# EAGLE board LEDSubMatrixHighDensity_template (EAGLE 9.6.2)
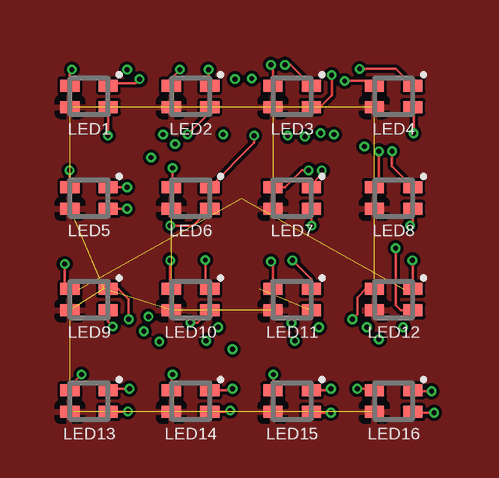
[diagram p0: board, top side]
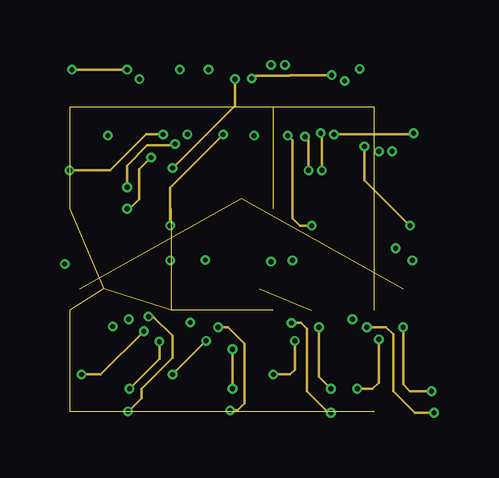
[diagram p1: board, inner layer InnerBottom]
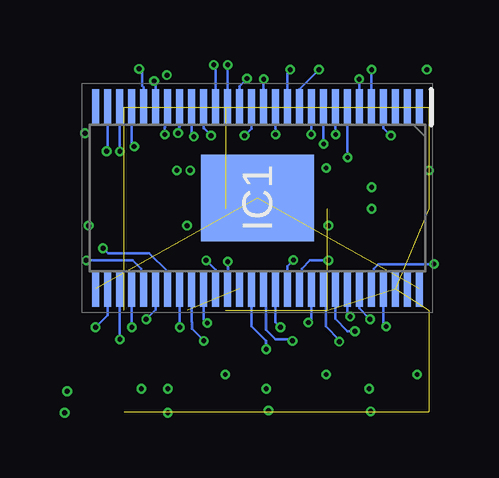
[diagram p2: board, bottom side, seen from below]

No outline drawn. Coordinates in mm, seen from the top.
Copper layers (1+2*15+16): Top 0.035mm / dielectric 0.2mm / InnerTop 0.0175mm / dielectric 1.065mm / InnerBottom 0.0175mm / dielectric 0.2mm / Bottom 0.035mm
Design rules "jlcpcb_4layer_1oz *": minimum track width 3.5mil, minimum drill 0.2mm, track to track 5mil, track to pad 0.2mm, pad to pad 5mil, via to via 6mil, smd to smd 5mil, copper to edge 40mil, drill to drill 6mil, minimum pad ring 10mil, minimum via ring 0.1mm, stop-mask expansion 4mil, vias tented up to drill 0mil, thermal gap 10mil

## Footprints (pad centres in the part's own frame; a part is rotated, then mirrored left to right if it is on the bottom)
SOP50P810X120-57N = smd 1.475 x 0.3: 1 -3.788,6.75; 2 -3.788,6.25; 3 -3.788,5.75; 4 -3.788,5.25; 5 -3.788,4.75; 6 -3.788,4.25; 7 -3.788,3.75; 8 -3.788,3.25; 9 -3.788,2.75; 10 -3.788,2.25; 11 -3.788,1.75; 12 -3.788,1.25; 13 -3.788,0.75; 14 -3.788,0.25; 15 -3.788,-0.25; 16 -3.788,-0.75; 17 -3.788,-1.25; 18 -3.788,-1.75; 19 -3.788,-2.25; 20 -3.788,-2.75; 21 -3.788,-3.25; 22 -3.788,-3.75; 23 -3.788,-4.25; 24 -3.788,-4.75; 25 -3.788,-5.25; 26 -3.788,-5.75; 27 -3.788,-6.25; 28 -3.788,-6.75; 29 3.788,-6.75; 30 3.788,-6.25; 31 3.788,-5.75; 32 3.788,-5.25; 33 3.788,-4.75; 34 3.788,-4.25; 35 3.788,-3.75; 36 3.788,-3.25; 37 3.788,-2.75; 38 3.788,-2.25; 39 3.788,-1.75; 40 3.788,-1.25; 41 3.788,-0.75; 42 3.788,-0.25; 43 3.788,0.25; 44 3.788,0.75; 45 3.788,1.25; 46 3.788,1.75; 47 3.788,2.25; 48 3.788,2.75; 49 3.788,3.25; 50 3.788,3.75; 51 3.788,4.25; 52 3.788,4.75; 53 3.788,5.25; 54 3.788,5.75; 55 3.788,6.25; 56 3.788,6.75 | smd 3.61 x 4.7: 57 0,0
B38G3RGB = smd 0.8 x 0.5: 1 0.8,0.45; 2 0.8,-0.45; 3 -0.8,-0.45; 4 -0.8,0.45

## Placement (x,y rotation side)
IC1  TLC5955DCAR  [SOP50P810X120-57N]  8.47,-6.35 270 bottom
LED1  B38G3RGB  [B38G3RGB]  2.12,-2.12 0 top
LED2  B38G3RGB  [B38G3RGB]  6.35,-2.12 0 top
LED3  B38G3RGB  [B38G3RGB]  10.58,-2.12 0 top
LED4  B38G3RGB  [B38G3RGB]  14.82,-2.12 0 top
LED5  B38G3RGB  [B38G3RGB]  2.12,-6.35 0 top
LED6  B38G3RGB  [B38G3RGB]  6.35,-6.35 0 top
LED7  B38G3RGB  [B38G3RGB]  10.58,-6.35 0 top
LED8  B38G3RGB  [B38G3RGB]  14.82,-6.35 0 top
LED9  B38G3RGB  [B38G3RGB]  2.12,-10.58 0 top
LED10  B38G3RGB  [B38G3RGB]  6.35,-10.58 0 top
LED11  B38G3RGB  [B38G3RGB]  10.58,-10.58 0 top
LED12  B38G3RGB  [B38G3RGB]  14.82,-10.58 0 top
LED13  B38G3RGB  [B38G3RGB]  2.12,-14.82 0 top
LED14  B38G3RGB  [B38G3RGB]  6.35,-14.82 0 top
LED15  B38G3RGB  [B38G3RGB]  10.58,-14.82 0 top
LED16  B38G3RGB  [B38G3RGB]  14.82,-14.82 0 top

## Library data of the parts
IC1 = TLC5955DCAR; ARROW_PART_NUMBER: TLC5955DCAR; ARROW_PRICE-STOCK: https://www.arrow.com/en/products/tlc5955dcar/texas-instruments; DESCRIPTION: 48ch, 16bit PWM LED Driver with Dot-Correction, Brightness Control, Open/Short Detection; HEIGHT: 1.2mm; MANUFACTURER_NAME: Texas Instruments; MANUFACTURER_PART_NUMBER: TLC5955DCAR; MOUSER_PART_NUMBER: 595-TLC5955DCAR; MOUSER_PRICE-STOCK: https://www.mouser.co.uk/ProductDetail/Texas-Instruments/TLC5955DCAR?qs=%2Fd%252BFzHvH4c3zo%2FeGYG5n7g%3D%3D
LED1-LED16 = B38G3RGB; ARROW_PART_NUMBER: SML-LX0606IGC-TR; ARROW_PRICE-STOCK: https://www.arrow.com/en/products/sml-lx0606igc-tr/lumex; DESCRIPTION: Standard LEDs - SMD Surface Mount LEDs; HEIGHT: 0.7mm; MANUFACTURER_NAME: Lumex; MANUFACTURER_PART_NUMBER: SML-LX0606IGC-TR; MOUSER_PART_NUMBER: 696-SML-0606IGCTR; MOUSER_PRICE-STOCK: https://www.mouser.co.uk/ProductDetail/Lumex/SML-LX0606IGC-TR?qs=I1ILoAvtKy%252BVd7WFwiUkZQ%3D%3D

## Nets
3V3: IC1.54 LED1.3 LED2.3 LED3.3 LED4.3 LED5.3 LED6.3 LED7.3 LED8.3 LED9.3 LED10.3 LED11.3 LED12.3 LED13.3 LED14.3 LED15.3 LED16.3
GND: IC1.29 IC1.56 IC1.57
GSCLK: IC1.55
LAT: IC1.3
N$LEDB1_IC1_PIN4: IC1.4 LED1.2
N$LEDB2_IC1_PIN10: IC1.10 LED2.2
N$LEDB3_IC1_PIN16: IC1.16 LED3.2
N$LEDB4_IC1_PIN22: IC1.22 LED4.2
N$LEDB5_IC1_PIN7: IC1.7 LED5.2
N$LEDB6_IC1_PIN13: IC1.13 LED6.2
N$LEDB7_IC1_PIN19: IC1.19 LED7.2
N$LEDB8_IC1_PIN25: IC1.25 LED8.2
N$LEDB9_IC1_PIN53: IC1.53 LED9.2
N$LEDB10_IC1_PIN47: IC1.47 LED10.2
N$LEDB11_IC1_PIN41: IC1.41 LED11.2
N$LEDB12_IC1_PIN35: IC1.35 LED12.2
N$LEDB13_IC1_PIN50: IC1.50 LED13.2
N$LEDB14_IC1_PIN44: IC1.44 LED14.2
N$LEDB15_IC1_PIN38: IC1.38 LED15.2
N$LEDB16_IC1_PIN32: IC1.32 LED16.2
N$LEDG1_IC1_PIN6: IC1.6 LED1.1
N$LEDG2_IC1_PIN12: IC1.12 LED2.1
N$LEDG3_IC1_PIN18: IC1.18 LED3.1
N$LEDG4_IC1_PIN24: IC1.24 LED4.1
N$LEDG5_IC1_PIN9: IC1.9 LED5.1
N$LEDG6_IC1_PIN15: IC1.15 LED6.1
N$LEDG7_IC1_PIN21: IC1.21 LED7.1
N$LEDG8_IC1_PIN27: IC1.27 LED8.1
N$LEDG9_IC1_PIN51: IC1.51 LED9.1
N$LEDG10_IC1_PIN45: IC1.45 LED10.1
N$LEDG11_IC1_PIN39: IC1.39 LED11.1
N$LEDG12_IC1_PIN33: IC1.33 LED12.1
N$LEDG13_IC1_PIN48: IC1.48 LED13.1
N$LEDG14_IC1_PIN42: IC1.42 LED14.1
N$LEDG15_IC1_PIN36: IC1.36 LED15.1
N$LEDG16_IC1_PIN30: IC1.30 LED16.1
N$LEDR1_IC1_PIN5: IC1.5 LED1.4
N$LEDR2_IC1_PIN11: IC1.11 LED2.4
N$LEDR3_IC1_PIN17: IC1.17 LED3.4
N$LEDR4_IC1_PIN23: IC1.23 LED4.4
N$LEDR5_IC1_PIN8: IC1.8 LED5.4
N$LEDR6_IC1_PIN14: IC1.14 LED6.4
N$LEDR7_IC1_PIN20: IC1.20 LED7.4
N$LEDR8_IC1_PIN26: IC1.26 LED8.4
N$LEDR9_IC1_PIN52: IC1.52 LED9.4
N$LEDR10_IC1_PIN46: IC1.46 LED10.4
N$LEDR11_IC1_PIN40: IC1.40 LED11.4
N$LEDR12_IC1_PIN34: IC1.34 LED12.4
N$LEDR13_IC1_PIN49: IC1.49 LED13.4
N$LEDR14_IC1_PIN43: IC1.43 LED14.4
N$LEDR15_IC1_PIN37: IC1.37 LED15.4
N$LEDR16_IC1_PIN31: IC1.31 LED16.4
SCLK: IC1.2
SIN_MCU: IC1.1
SOUT1: IC1.28

## Tracks (layer width: path | path; a pad name or v marks a point on that pad's centre or on a via)
3V3  (16 unrouted)
  pour Top: -20,20 40,20 40,-140
GND  (2 unrouted)
N$LEDB1_IC1_PIN4  (via drill 0.2 pad 0.4)
  Top 0.1: v2.9,-3.75 2.9,-2.58 LED1.2
  Bottom 0.1: IC1.4 3.22,-3.44 v2.9,-3.75
N$LEDB2_IC1_PIN10  (via drill 0.2)
  Top 0.1: v6.22,-3.7 7.15,-2.77 LED2.2
  Bottom 0.1: IC1.10 v6.22,-3.7
N$LEDB3_IC1_PIN16  (via drill 0.2)
  Top 0.1: v12.24,-1.23 12.24,-2.06 11.73,-2.57 LED3.2
  InnerBottom 0.1: v12.24,-1.23 10.5,-1.23 10.47,-1.25 9.02,-1.25 v8.9,-1.37
  Bottom 0.1: IC1.16 9.22,-1.69 v8.9,-1.37
N$LEDB4_IC1_PIN22  (via drill 0.2)
  Top 0.1: v15.65,-3.65 15.65,-2.6 LED4.2
  InnerBottom 0.1: v12.33,-3.7 15.61,-3.7 v15.65,-3.65
  Bottom 0.1: IC1.22 12.32,-2.66 12.32,-3.4 12.33,-3.41 v12.33,-3.7
N$LEDB5_IC1_PIN7  (via drill 0.2 pad 0.4)
  Top 0.1: v3.7,-6.8 LED5.2
  InnerBottom 0.1: v4.7,-4.66 4.2,-5.16 4.2,-6.4 3.8,-6.8 v3.7,-6.8
  Bottom 0.1: IC1.7 4.7,-2.58 v4.7,-4.66 | v4.7,-4.66
N$LEDB6_IC1_PIN13  (via drill 0.2)
  Top 0.1: v5.5,-7.5 6.45,-7.5 LED6.2
  InnerBottom 0.1: v7.71,-3.71 5.5,-5.91 v5.5,-7.5
  Bottom 0.1: IC1.13 7.72,-3.7 v7.71,-3.71
N$LEDB7_IC1_PIN19  (via drill 0.2)
  Top 0.1: v11.4,-7.5 11.38,-7.48 LED7.2
  InnerBottom 0.1: v10.4,-3.75 10.6,-3.95 10.6,-7.2 10.9,-7.5 v11.4,-7.5
  Bottom 0.1: IC1.19 10.72,-3.45 10.7,-3.45 v10.4,-3.75
N$LEDB8_IC1_PIN25  (via drill 0.2)
  Top 0.1: v15.5,-7.5 15.62,-7.38 LED8.2
  InnerBottom 0.1: v13.6,-4.21 13.6,-5.6 v15.5,-7.5
  Bottom 0.1: IC1.25 13.72,-4.09 v13.6,-4.21
N$LEDB9_IC1_PIN53  (via drill 0.2)
  Top 0.1: v3.1,-11.7 2.92,-11.52 LED9.2
  Bottom 0.1: IC1.53 3.22,-11.58 v3.1,-11.7
N$LEDB10_IC1_PIN47  (via drill 0.2)
  Top 0.1: v6.34,-11.54 6.65,-11.54 LED10.2
  Bottom 0.1: IC1.47 6.22,-11.42 v6.34,-11.54
N$LEDB11_IC1_PIN41  (1 unrouted)
N$LEDB12_IC1_PIN35  (via drill 0.2)
  Top 0.1: v14.9,-8.44 14.9,-10.82 15.11,-11.03 LED12.2
  Bottom 0.1: IC1.35 12.22,-9.4 12.97,-8.64 14.7,-8.64 v14.9,-8.44
N$LEDB13_IC1_PIN50  (via drill 0.2)
  Top 0.1: v3.74,-15.24 3.71,-15.27 LED13.2
  InnerBottom 0.1: v4.59,-11.29 4.79,-11.29 5.59,-12.09 5.59,-13.01 4.3,-14.3 4.3,-14.7 3.76,-15.24 v3.74,-15.24
  Bottom 0.1: IC1.50 4.72,-11.17 v4.59,-11.29
N$LEDB14_IC1_PIN44  (via drill 0.2)
  Top 0.1: v8,-15.2 7.93,-15.27 LED14.2
  InnerBottom 0.1: v7.5,-11.74 7.92,-11.74 8.6,-12.42 8.6,-14.9 8.3,-15.2 v8,-15.2
  Bottom 0.1: IC1.44 7.72,-11.52 v7.5,-11.74
N$LEDB15_IC1_PIN38  (via drill 0.2)
  Top 0.1: v12.2,-15.3 11.42,-15.3 LED15.2
  InnerBottom 0.1: v10.55,-11.55 10.95,-11.55 11.2,-11.8 11.2,-14.4 12.1,-15.3 v12.2,-15.3
  Bottom 0.1: IC1.38 10.72,-11.39 v10.55,-11.55
N$LEDB16_IC1_PIN32  (via drill 0.2)
  Top 0.1: v16.5,-15.3 15.65,-15.3 LED16.2
  InnerBottom 0.1: v13.7,-11.74 14.5,-11.74 14.8,-12.04 14.8,-14.4 15.7,-15.3 v16.5,-15.3
  Bottom 0.1: IC1.32 13.72,-11.72 v13.7,-11.74
N$LEDG1_IC1_PIN6  (via drill 0.2 pad 0.4)
  Top 0.1: v4.22,-1.4 4.05,-1.57 3.02,-1.57 LED1.1
  Bottom 0.1: IC1.6 v4.22,-1.4
N$LEDG2_IC1_PIN12  (via drill 0.2)
  Top 0.1: v7.1,-1 7.1,-1.62 LED2.1
  Bottom 0.1: IC1.12 7.22,-1.12 v7.1,-1
N$LEDG3_IC1_PIN18  (via drill 0.2)
  Top 0.1: v10.29,-0.8 10.52,-0.8 LED3.1
  Bottom 0.1: IC1.18 10.22,-0.87 v10.29,-0.8
N$LEDG4_IC1_PIN24  (via drill 0.2)
  Top 0.1: v13.4,-0.97 14.92,-0.97 LED4.1
  Bottom 0.1: IC1.24 13.22,-1.75 13.28,-1.68 13.28,-1.09 v13.4,-0.97
N$LEDG5_IC1_PIN9  (via drill 0.2 pad 0.4)
  Top 0.1: v3.7,-5.9 LED5.1
  InnerBottom 0.1: v5.7,-4.1 5.7,-4.12 5.74,-4.16 4.54,-4.16 3.7,-5 v3.7,-5.9
  Bottom 0.1: IC1.9 5.72,-4.08 v5.7,-4.1
N$LEDG6_IC1_PIN15  (via drill 0.2)
  Top 0.1: v9,-3.75 9,-4.05 LED6.1
  Bottom 0.1: IC1.15 8.72,-3.47 v9,-3.75
N$LEDG7_IC1_PIN21  (via drill 0.2)
  Top 0.1: v11.82,-5.2 11.78,-5.25 11.78,-5.41 11.38,-5.8 LED7.1
  InnerBottom 0.1: v11.78,-3.65 11.82,-3.7 v11.82,-5.2
  Bottom 0.1: IC1.21 11.72,-3.38 11.72,-3.39 11.72,-3.6 v11.78,-3.65
N$LEDG8_IC1_PIN27  (via drill 0.2)
  Top 0.1: v14.75,-4.4 14.75,-5.04 LED8.1
  Bottom 0.1: IC1.27 14.72,-4.36 v14.75,-4.4
N$LEDG9_IC1_PIN51  (via drill 0.2)
  Top 0.1: v3.77,-11.4 3.77,-10.57 3.33,-10.13 LED9.1
  Bottom 0.1: IC1.51 4.22,-10.95 v3.77,-11.4
N$LEDG10_IC1_PIN45  (via drill 0.2)
  Top 0.1: v6.97,-8.93 6.97,-9.95 LED10.1
  Bottom 0.1: IC1.45 7.22,-9.18 v6.97,-8.93
N$LEDG11_IC1_PIN39  (via drill 0.2)
  Top 0.1: v10.6,-8.95 11.38,-9.73 LED11.1
  Bottom 0.1: IC1.39 10.22,-9.33 v10.6,-8.95
N$LEDG12_IC1_PIN33  (via drill 0.2)
  Top 0.1: v15.6,-8.95 15.62,-8.96 LED12.1
  Bottom 0.1: IC1.33 13.32,-10.04 13.32,-9.3 13.67,-8.95 v15.6,-8.95
N$LEDG13_IC1_PIN48  (via drill 0.2)
  Top 0.1: v3.8,-14.3 2.98,-14.3 LED13.1
  InnerBottom 0.1: v5.05,-12.33 5.05,-13.05 v3.8,-14.3
  Bottom 0.1: IC1.48 5.62,-10.24 5.62,-11.7 5.05,-12.27 v5.05,-12.33
N$LEDG14_IC1_PIN42  (via drill 0.2)
  Top 0.1: v8.1,-14.3 8.03,-14.37 LED14.1
  InnerBottom 0.1: v8.1,-12.65 v8.1,-12.66 v8.1,-14.3
  Bottom 0.1: IC1.42 8.72,-11.68 8.1,-12.3 v8.1,-12.65
N$LEDG15_IC1_PIN36  (via drill 0.2)
  Top 0.1: v12.2,-14.3 12.13,-14.37 LED15.1
  InnerBottom 0.1: v11.7,-11.74 11.7,-13.8 v12.2,-14.3
  Bottom 0.1: IC1.36 11.72,-11.72 v11.7,-11.74
N$LEDG16_IC1_PIN30  (via drill 0.2)
  Top 0.1: v16.4,-14.4 15.65,-14.4 LED16.1
  InnerBottom 0.1: v15.21,-11.74 15.21,-14.11 15.5,-14.4 v16.4,-14.4
  Bottom 0.1: IC1.30 14.72,-11.24 v15.21,-11.74
N$LEDR1_IC1_PIN5  (via drill 0.2 pad 0.4)
  Top 0.1: v1.4,-1 1.32,-1.08 LED1.4
  InnerBottom 0.1: v3.7,-1 v1.4,-1
  Bottom 0.1: IC1.5 3.72,-1.02 v3.7,-1
N$LEDR2_IC1_PIN11  (via drill 0.2)
  Top 0.1: v5.9,-1 5.55,-1.35 LED2.4
  Bottom 0.1: IC1.11 6.72,-1.82 v5.9,-1
N$LEDR3_IC1_PIN17  (via drill 0.2)
  Top 0.1: v9.7,-0.8 9.78,-0.88 LED3.4
  Bottom 0.1: IC1.17 9.72,-0.82 v9.7,-0.8
N$LEDR4_IC1_PIN23  (via drill 0.2)
  Top 0.1: v12.78,-1.48 13.82,-1.48 LED4.4
  Bottom 0.1: IC1.23 12.72,-1.53 v12.78,-1.48
N$LEDR5_IC1_PIN8  (via drill 0.2 pad 0.4)
  Top 0.1: v1.3,-5.2 1.32,-5.22 LED5.4
  InnerBottom 0.1: v5.2,-3.7 4.5,-3.7 3,-5.2 v1.3,-5.2
  Bottom 0.1: IC1.8 5.22,-3.69 v5.2,-3.7
N$LEDR6_IC1_PIN14  (via drill 0.2)
  Top 0.1: v5.6,-5.1 5.6,-5.85 LED6.4
  InnerBottom 0.1: v8.2,-1.4 8.2,-2.5 v5.6,-5.1
  Bottom 0.1: IC1.14 8.22,-1.42 v8.2,-1.4
N$LEDR7_IC1_PIN20  (via drill 0.2)
  Top 0.1: v11.27,-5.2 10.99,-5.2 10.28,-5.9 LED7.4
  InnerBottom 0.1: v11.12,-3.8 11.27,-3.95 v11.27,-5.2
  Bottom 0.1: IC1.20 11.22,-3.7 v11.12,-3.8
N$LEDR8_IC1_PIN26  (via drill 0.2)
  Top 0.1: v14.2,-4.41 14.2,-5.72 LED8.4
  Bottom 0.1: IC1.26 14.22,-4.39 v14.2,-4.41
N$LEDR9_IC1_PIN52  (via drill 0.2)
  Top 0.1: v1.1,-9.1 1.1,-9.92 LED9.4
  Bottom 0.1: IC1.52 3.62,-10.04 3.62,-9.3 3.42,-9.1 v1.1,-9.1
N$LEDR10_IC1_PIN46  (via drill 0.2)
  Top 0.1: v5.5,-8.95 5.5,-10.08 LED10.4
  Bottom 0.1: IC1.46 6.62,-10.04 6.62,-9.3 6.27,-8.95 v5.5,-8.95
N$LEDR11_IC1_PIN40  (via drill 0.2)
  Top 0.1: v9.7,-9 9.78,-9.08 LED11.4
  Bottom 0.1: IC1.40 9.7,-10.12 v9.7,-9
N$LEDR12_IC1_PIN34  (via drill 0.2)
  Top 0.1: LED12.4 13.67,-10.13 13.3,-10.5 13.3,-11.2 v13.1,-11.4
  Bottom 0.1: IC1.34 12.72,-11.02 v13.1,-11.4
N$LEDR13_IC1_PIN49  (via drill 0.2)
  Top 0.1: v1.8,-13.7 1.32,-14.18 LED13.4
  InnerBottom 0.1: v4.4,-11.9 2.6,-13.7 v1.8,-13.7
  Bottom 0.1: v4.4,-11.9 4.7,-11.9 5.22,-11.38 IC1.49
N$LEDR14_IC1_PIN43  (via drill 0.2)
  Top 0.1: v5.6,-13.7 5.55,-13.75 LED14.4
  InnerBottom 0.1: v7,-12.3 v5.6,-13.7
  Bottom 0.1: IC1.43 8.12,-10.24 8.12,-11.83 7.71,-12.24 7.06,-12.24 v7,-12.3
N$LEDR15_IC1_PIN37  (via drill 0.2)
  Top 0.1: v9.8,-13.7 9.8,-14.35 LED15.4
  InnerBottom 0.1: v10.7,-12.3 10.7,-13.5 10.5,-13.7 v9.8,-13.7
  Bottom 0.1: IC1.37 11.22,-11.51 11.2,-11.53 11.2,-11.8 v10.7,-12.3
N$LEDR16_IC1_PIN31  (via drill 0.2)
  Top 0.1: v13.3,-14.3 13.95,-14.3 LED16.4
  InnerBottom 0.1: v14.2,-12.24 14.2,-14.04 13.94,-14.3 v13.3,-14.3
  Bottom 0.1: IC1.31 14.22,-12.22 v14.2,-12.24